# Altium PCB PCB.PcbDoc
Units mil, origin at the board's own origin, x right, y up, seen from the top; angles counter-clockwise.
Board outline 6000 x 4000 mil, 2 copper layers (Top Layer, Bottom Layer); 75 components, 68 nets, 209 pads, 0 vias.
Unrouted connection lines stored in the file: 142.
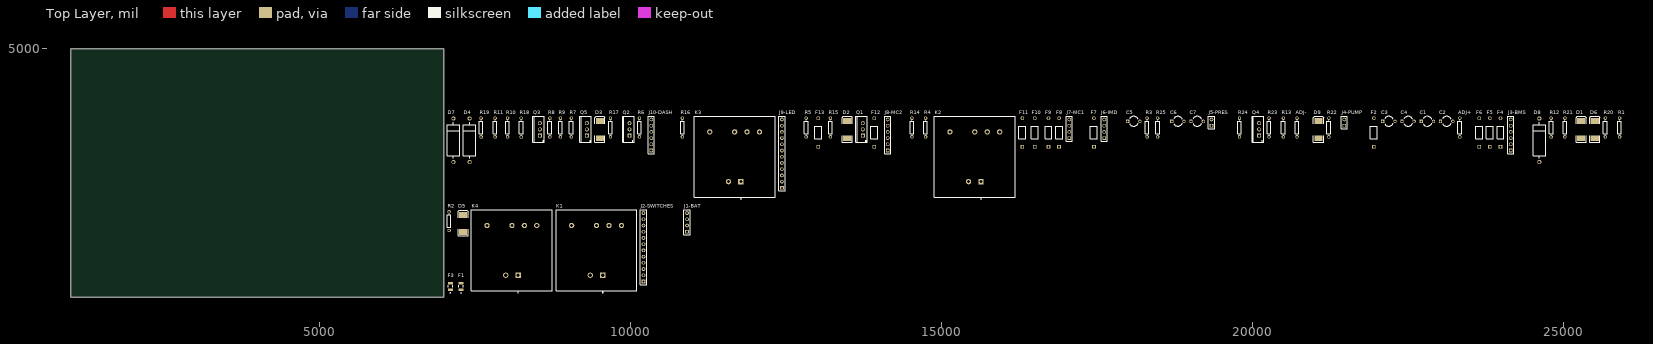
[diagram p0: Top Layer view]
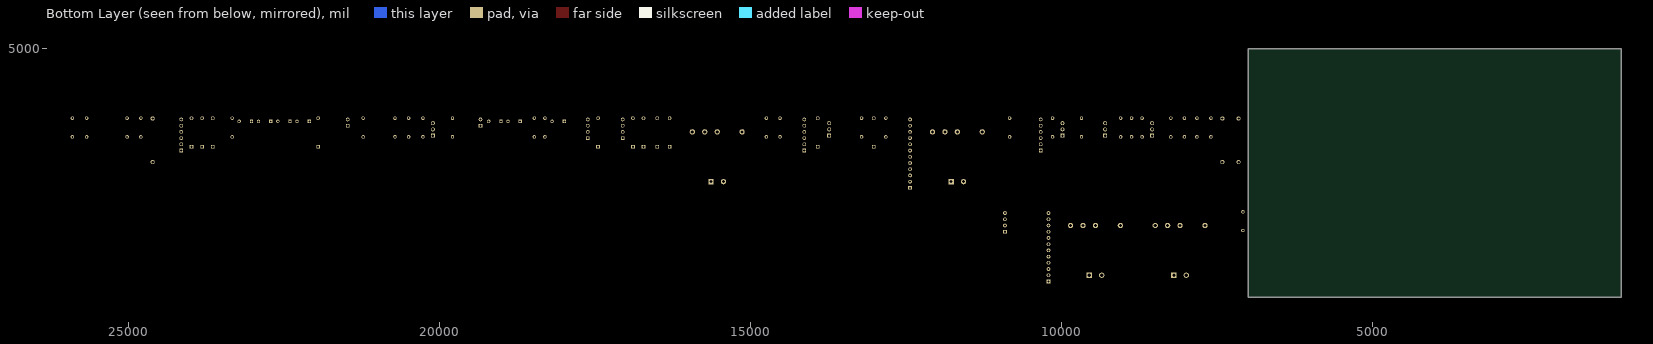
[diagram p1: Bottom Layer view, seen from below]

## Layer stack, top to bottom
Top Solder: solder mask 0.4, Solder Resist, Dk 3.5
Top Layer: signal copper 1.4
Dielectric 1: dielectric 12.6, FR-4, Dk 4.8
Bottom Layer: signal copper 1.4
Bottom Solder: solder mask 0.4, Solder Resist, Dk 3.5

## Board outline
1000,1000 7000,1000 7000,5000 1000,5000

## Design rules (kind name [scope] priority, off if disabled: settings)
Clearance [All] p1: gap=10 ignorepadtopadclearanceinfootprint=FALSE except(0: Arc-Hole Track-Hole SMDPad-Hole THPad-Hole Via-Hole Fill-Hole Poly-Hole Region-Hole Text-Hole)
PolygonConnect [All] p1: connectstyle=Relief reliefconductorwidth=10 reliefentries=4 polygonreliefangle="90 Angle" airgapwidth=10
RoomDefinition Schematic [InComponentClass('Schematic')] p1: confinementstyle=ConfineIn formatcopy=TRUE lockcomponents=FALSE outline 7045,1060 25975,1060 25975,4020 7045,4020
RoutingVias [All] p1: holewidth=28 width=50 viastyle="Through Hole" minholewidth=28 minwidth=50 maxholewidth=28 maxwidth=50
SolderMaskExpansion [All] p1: expansion=4
Width [All] p1: maxlimit=10 minlimit=10 preferedwidth=10
30 further rules are at their usual default settings.

## Components (designator, comment, footprint, x,y, rotation, side; value= is the part's Value field where it differs from the comment)
ADJ+ "Res1" AXIAL-0.3 23330,3730 r90 top value=1K
ADJ- "Res1" AXIAL-0.3 20715,3730 r90 top value=1K
C1 "" CAPR5-4X5 22810,3830 r0 top value=100pF
C2 "" CAPR5-4X5 23120,3830 r0 top value=100pF
C3 "" CAPR5-4X5 22190,3830 r0 top value="220 uF"
C4 "" CAPR5-4X5 22500,3830 r0 top value="220 uF"
C5 "Cap2" CAPR5-4X5 18090,3830 r0 top value=100pF
C6 "Cap2" CAPR5-4X5 18800,3830 r0 top value="220 uF"
C7 "Cap2" CAPR5-4X5 19110,3830 r0 top value="220 uF"
D1 "Diode" SMC 25280,3695 r90 top
D2 "Diode" SMC 13485,3695 r90 top
D3 "Diode" SMC 9510,3695 r90 top
D4 "D Zener" DIODE-0.7 7415,3525 r90 top
D5 "Diode" SMC 7310,2190 r90 top
D6 "Diode" SMC 25500,3695 r90 top
D7 "D1" DIODE-0.7 7155,3525 r90 top
D8 "D Zener" DIODE-0.7 24610,3525 r90 top
D9 "Diode" SMC 21060,3695 r90 top
F1 "3413.0330.22" FUS_SCHURTER_341 7275,1175 r90 top value=Value
F2 "7 A" PIN-W2/E2.8 21950,3650 r90 top
F3 "3413.0330.22" FUS_SCHURTER_341 7105,1175 r90 top value=Value
F4 "100 mA" PIN-W2/E2.8 23985,3650 r90 top
F5 "1 A" PIN-W2/E2.8 23815,3650 r90 top
F6 "100 mA" PIN-W2/E2.8 23645,3650 r90 top
F7 "100 mA" PIN-W2/E2.8 17450,3650 r90 top
F8 "100 mA" PIN-W2/E2.8 16890,3650 r90 top
F9 "100 mA" PIN-W2/E2.8 16720,3650 r90 top
F10 "100 mA" PIN-W2/E2.8 16500,3650 r90 top
F11 "100 mA" PIN-W2/E2.8 16300,3650 r90 top
F12 "100 mA" PIN-W2/E2.8 13920,3650 r90 top
F13 "100 mA" PIN-W2/E2.8 13020,3650 r90 top
J1-BAT "Part Name" HDR1X4 10910,2055 r90 top
J2-SWITCHES "Header 12" HDR1X12 10210,1255 r90 top
J3-BMS "Header 6" HDR1X6 24150,3360 r90 top
J4-PUMP "Header 2" HDR1X2 21475,3760 r90 top
J5-PRES "Header 2" HDR1X2 19340,3760 r90 top
J6-IMD "Header 4" HDR1X4 17615,3560 r90 top
J7-MC1 "Header 4" HDR1X4 17055,3560 r90 top
J8-MC2 "Header 6" HDR1X6 14135,3360 r90 top
J9-LED "Header 12" HDR1X12 12435,2760 r90 top
J10-DASH "Header 6" HDR1X6 10335,3360 r90 top
K1 "Relay-DPST" MODULE6 9455,1755 r0 top
K2 "Relay-DPST" MODULE6 15535,3260 r0 top
K3 "Relay-DPST" MODULE6 11675,3260 r0 top
K4 "Relay-DPST" MODULE6 8095,1755 r0 top
Q1 "NMOS-2" TO-220AB 13735,3700 r90 top
Q2 "NMOS-2" TO-220AB 9985,3700 r90 top
Q3 "NMOS-2" TO-220AB 8545,3700 r90 top
Q4 "NMOS-2" TO-220AB 20105,3700 r90 top
Q5 "PMOS-2" TO-220AB 9300,3700 r90 top
R1 "Res1" AXIAL-0.3 25900,3730 r90 top value=71.5
R2 "Res1" AXIAL-0.3 7085,2225 r90 top value=71.5
R3 "Res1" AXIAL-0.3 18305,3730 r90 top value=1K
R4 "Res1" AXIAL-0.3 14745,3730 r90 top value=510
R5 "Res1" AXIAL-0.3 12825,3730 r90 top value=100
R6 "Res1" AXIAL-0.3 10145,3730 r90 top value=510
R7 "Res1" AXIAL-0.3 9050,3730 r90 top value=1K
R8 "Res1" AXIAL-0.3 8705,3730 r90 top value=510
R9 "Res1" AXIAL-0.3 8875,3730 r90 top value=10K
R10 "Res1" AXIAL-0.3 8025,3730 r90 top value=2.2K
R11 "Res1" AXIAL-0.3 7825,3730 r90 top value=1K
R12 "Res1" AXIAL-0.3 24800,3730 r90 top value=442
R13 "Res1" AXIAL-0.3 20495,3730 r90 top value=10K
R14 "Res1" AXIAL-0.3 14525,3730 r90 top value=84.5K
R15 "Res1" AXIAL-0.3 13215,3730 r90 top value=34.0K
R16 "Res1" AXIAL-0.3 10835,3730 r90 top value=10K
R17 "Res1" AXIAL-0.3 9680,3730 r90 top value=10K
R18 "Res1" AXIAL-0.3 8245,3730 r90 top value=510
R19 "Res1" AXIAL-0.3 7600,3730 r90 top value=10K
R20 "Res1" AXIAL-0.3 25670,3730 r90 top value=510
R21 "Res1" AXIAL-0.3 25020,3730 r90 top value=10K
R22 "Res1" AXIAL-0.3 21225,3730 r90 top value=1.1K
R23 "Res1" AXIAL-0.3 20265,3730 r90 top value=510
R24 "Res1" AXIAL-0.3 19790,3730 r90 top value=150
R25 "Res1" AXIAL-0.3 18475,3730 r90 top value=510

## Footprints (in the part's own frame and the unit in brackets; to place one, negate y for a bottom-side part, rotate by r counter-clockwise, add the part's x,y. Pads: shape width x height; smd on the part's side, far side on the other; paste and mask are expansions set on the pad)
AXIAL-0.3 [mm] "Axial Device, Thru-Hole; 2 Leads; 0.3 in Pin Spacing"
  round 1.4 hole 0.85: 1(-3.81,0) 2(3.81,0)
  silkscreen extent -2.77,-0.76 2.77,0.76
CAPR5-4X5 [mm] "Capacitor; 2 Leads"
  rect 1.35x1.35 hole 0.8: 1(-2.5,0)
  round 1.35 hole 0.8: 2(2.5,0)
  silkscreen extent -1.69,-2 1.82,2
DIODE-0.7 [mm] "Diode, Thru-Hole; 2 Leads; 0.7 in Pin Spacing"
  round 1.65 hole 1: 1(-8.89,0) 2(8.89,0)
  silkscreen extent -7.37,-2.54 7.37,2.54
FUS_SCHURTER_341 [mil]
  rect 43.5x79 smd paste+0 mask+0: 1(-51.25,0) 2(51.25,0)
  silkscreen extent -106,-36 16,36, body extent -63,-39 115,45, height 24
HDR1X2 [mm] "Connector; Header; 2 Position"
  rect 1.5x1.5 hole 0.9: 1(0,0)
  round 1.5 hole 0.9: 2(2.54,0)
  silkscreen extent -1.27,-1.27 3.81,1.27
HDR1X4 [mm] "Connector; Header; 4 Position"
  rect 1.5x1.5 hole 0.9: 1(0,0)
  round 1.5 hole 0.9: 2(2.54,0) 3(5.08,0) 4(7.62,0)
  silkscreen extent -1.27,-1.27 8.89,1.27
HDR1X6 [mm] "Connector; Header; 6 Position"
  rect 1.5x1.5 hole 0.9: 1(0,0)
  round 1.5 hole 0.9: 2(2.54,0) 3(5.08,0) 4(7.62,0) 5(10.16,0) 6(12.7,0)
  silkscreen extent -1.27,-1.27 13.97,1.27
HDR1X12 [mm] "Connector; Header; 12 Position"
  rect 1.5x1.5 hole 0.9: 1(0,0)
  round 1.5 hole 0.9: 2(2.54,0) 3(5.08,0) 4(7.62,0) 5(10.16,0) 6(12.7,0) 7(15.24,0) 8(17.78,0) 9(20.32,0) 10(22.86,0) 11(25.4,0) 12(27.94,0)
  silkscreen extent -1.27,-1.27 29.21,1.27
MODULE6 [mm] "DIP; 6 Round Pins; Row Space 20.32 mm; Pitch 2.54 mm"
  rect 2.15x2.15 hole 1.3: 1(2.54,-10.16)
  round 2.15 hole 1.3: 2(-2.54,-10.16) 3(10.16,10.16) 4(5.08,10.16) 5(0,10.16) 6(-10.16,10.16)
  silkscreen extent -16.5,-17.27 16.5,16.5, body extent -16.5,-16.5 16.5,16.5, height 16.5
PIN-W2/E2.8 [mm] "Thru-Hole; 2 Leads"
  rect 1.5x1.5 hole 0.9: 1(-5.825,0)
  round 1.5 hole 0.9: 2(5.825,0)
  silkscreen extent -2.65,-1.4 2.65,1.4
SMC [mm] "DO-214-AB/SMC; 2 C-Bend Leads; Body 7.9 x 5.9 mm, inc. leads (LxW)"
  rect 2.4x3.3 smd: 1(-3.475,0) 2(3.475,0)
  silkscreen extent -5.07,-2.05 5.43,2.05
TO-220AB [mm] "TO, Thru-Hole, Vertical, Heatsink Mounted; 3 In-Line Leads; Pitch 2.54 mm"
  rect 1.6x1.6 hole 1: 1(-2.54,0)
  round 1.6 hole 1: 2(0,0) 3(2.54,0)
  silkscreen extent -5.35,-1.85 5.35,2.85, body extent -5.4,-1.9 5.4,2.9, height 19.3

## Part data
ADJ+ ADJ- R1 R2 R3 R4 R5 R6 R7 R8 R9 R10 R11 R12 R13 R14 R15 R16 R17 R18 R19 R20 R21 R22 R23 R24 R25: "Resistor", LatestRevisionDate=17-Jul-2002, LatestRevisionNote="Re-released for DXP Platform.", PackageDescription="Axial Device, Thru-Hole; 2 Leads; 0.3 in Pin Spacing", PackageReference=AXIAL-0.3, Published=8-Jun-2000, Publisher="Altium Limited"
C1 C2 C3 C4: library part Cap2, "Capacitor", PackageDescription="Capacitor; 2 Leads", PackageReference=CAPR5-4X5, Published=23-Sep-2002, Publisher="Altium Limited"
C5 C6 C7: "Capacitor", PackageDescription="Capacitor; 2 Leads", PackageReference=CAPR5-4X5, Published=23-Sep-2002, Publisher="Altium Limited"
D1 D2 D3 D5 D6 D9: "Default Diode", Code_JEDEC=DO-214-AB, LatestRevisionDate=17-Jul-2002, LatestRevisionNote="Re-released for DXP Platform.", PackageDescription="DO-214-AB/SMC; 2 C-Bend Leads; Body 7.9 x 5.9 mm, inc. leads (LxW)", PackageReference=SMC, PackageVersion=Sep-1996, Published=8-Jun-2000, Publisher="Altium Limited"
D4 D8: "Zener Diode", LatestRevisionDate=17-Jul-2002, LatestRevisionNote="Re-released for DXP Platform.", PackageDescription="Diode, Thru-Hole; 2 Leads; 0.7 in Pin Spacing", PackageReference=DIODE-0.7, Published=8-Jun-2000, Publisher="Altium Limited"
D7: library part "D Zener", "Zener Diode", LatestRevisionDate=17-Jul-2002, LatestRevisionNote="Re-released for DXP Platform.", PackageDescription="Diode, Thru-Hole; 2 Leads; 0.7 in Pin Spacing", PackageReference=DIODE-0.7, Published=8-Jun-2000, Publisher="Altium Limited"
F1 F3: "Imported", Built_By=EMA_UL_Team, C="Copyright (C) 2015 Accelerated Designs. All rights reserved", Manufacturer_Part_Number=3413.0330.22, RefDes=RefDes, Type=DEV, Vendor="Schurter Inc"
F2 F4 F5 F6 F7 F8 F9 F10 F11 F12 F13: library part "Fuse 2", "Fuse", LatestRevisionDate=17-Jul-2002, LatestRevisionNote="Re-released for DXP Platform.", PackageDescription="Thru-Hole; 2 Leads", PackageReference=PIN-W2/E2.8, Published=8-Jun-2000, Publisher="Altium Limited"
J1-BAT: library part "Header 4", "Header, 4-Pin", LatestRevisionDate=17-Jul-2002, LatestRevisionNote="Re-released for DXP Platform.", Publisher="Altium Limited"
J2-SWITCHES J9-LED: "Header, 12-Pin", LatestRevisionDate=17-Jul-2002, LatestRevisionNote="Re-released for DXP Platform.", Publisher="Altium Limited"
J3-BMS J8-MC2 J10-DASH: "Header, 6-Pin", LatestRevisionDate=17-Jul-2002, LatestRevisionNote="Re-released for DXP Platform.", Publisher="Altium Limited"
J4-PUMP J5-PRES: "Header, 2-Pin", LatestRevisionDate=17-Jul-2002, LatestRevisionNote="Re-released for DXP Platform.", Publisher="Altium Limited"
J6-IMD J7-MC1: "Header, 4-Pin", LatestRevisionDate=17-Jul-2002, LatestRevisionNote="Re-released for DXP Platform.", Publisher="Altium Limited"
K1 K2 K3 K4: "Dual-Pole Single-Throw Relay", LatestRevisionDate=17-Jul-2002, LatestRevisionNote="Re-released for DXP Platform.", PackageReference=MODULE6, Published=24-Mar-1999, Publisher="Altium Limited"
Q1 Q2 Q3 Q4: "N-Channel Power MOSFET", ComponentLink1Description="Manufacturer Link", ComponentLink1URL=http://www.irf.com/, DatasheetVersion=PD-9.814, LatestRevisionDate=17-Jul-2002, LatestRevisionNote="Re-released for DXP Platform.", Note="Pin 2 is electrically connected to pin 4.", PackageDescription="TO, Thru-Hole, Vertical, Heatsink Mounted; 3 In-Line Leads; Pitch 2.54 mm", PackageReference=TO-220AB, PackageVersion=Feb-1997, Published=8-Jun-2000, Publisher="Altium Limited"
Q5: "P-Channel Power MOSFET", ComponentLink1Description="Manufacturer Link", ComponentLink1URL=http://www.irf.com/, DatasheetVersion=PD-9.390D, LatestRevisionDate=17-Jul-2002, LatestRevisionNote="Re-released for DXP Platform.", Note="Pin 4 not drawn and electrically connected to Pin 2.", PackageDescription="TO, Thru-Hole, Vertical, Heatsink Mounted; 3 In-Line Leads; Pitch 2.54 mm", PackageReference=TO-220AB, PackageVersion=Feb-1997, Published=8-Jun-2000, Publisher="Altium Limited"

## Nets (pads, with @x,y where several pads share a name; then routed paths per layer and width w, separated by ;. In a path a pad name is that pad's centre, name@x,y a point inside that pad or via, vN(x,y) a via of type N, cw(c..) or ccw(c..) an arc to the next point about the centre after c; other vN are vias at no path point)
GND: ADJ+.2 C1.2 C2.2 C3.2 C4.2 C5.2 C6.2 C7.2 D4.1 D7.1 D8.1 D9.1 F9.2 J1-BAT.3 J1-BAT.4 J2-SWITCHES.7 J2-SWITCHES.11 J2-SWITCHES.12 J3-BMS.5 J3-BMS.6 J4-PUMP.1 J6-IMD.4 J8-MC2.5 J8-MC2.6 J10-DASH.1 Q1.3 Q3.3 Q4.3 R3.2 R10.2 R15.1
Net*_1: 
Net*_3: C1.1 C2.1 C5.1 K1.2 K1.4 R14.1 R22.1
Net*_4: ADJ-.1 F2.1
Net*_5: ADJ+.1 ADJ-.2
NetC3_1: C3.1 C4.1 F2.2 J10-DASH.4 R24.1
NetC6_1: C6.1 C7.1 D2.2 D6.2 F3.2 F5.2 J2-SWITCHES.4 J2-SWITCHES.5 J2-SWITCHES.6 K2.1 K2.3 K2.5 K4.1 K4.3 K4.5 Q5.3 R17.1 R23.1 R25.1
NetD1_1: D1.1 K1.6 R1.1
NetD1_2: D1.2 F1.2 K1.1 K1.3 K1.5
NetD2_1: D2.1 K2.6 Q1.2
NetD3_1: D3.1 K3.6 Q2.2
NetD3_2: D3.2 D9.2 J4-PUMP.2 K2.2 K2.4 K3.1 K3.3 K3.5 R4.1
NetD4_2: D4.2 J10-DASH.2 R11.2
NetD5_1: D5.1 F8.2 K3.2 K3.4 R6.2
NetD5_2: D5.2 K4.2 K4.4
NetD6_1: D6.1 F13.2 K4.6 R12.1
NetD7_2: D7.2 J10-DASH.5 R19.1
NetD8_2: D8.2 J10-DASH.3 R21.1
NetF1_1: F1.1 J1-BAT.1 J1-BAT.2
NetF3_1: F3.1
NetF4_1: F4.1 J3-BMS.4
NetF4_2: F4.2 R16.1 R17.2
NetF5_1: F5.1 J3-BMS.2 J3-BMS.3
NetF6_1: F6.1 J3-BMS.1
NetF6_2: F6.2
NetF7_1: F7.1 J6-IMD.3
NetF7_2: F7.2 R8.1 R9.1 R10.1 R11.1
NetF8_1: F8.1 J7-MC1.4
NetF9_1: F9.1 J7-MC1.3
NetF10_1: F10.1 J7-MC1.2
NetF10_2: F10.2 J2-SWITCHES.10
NetF11_1: F11.1 J7-MC1.1
NetF11_2: F11.2 Q4.2
NetF12_1: F12.1 J8-MC2.4
NetF12_2: F12.2 R25.2
NetF13_1: F13.1 J8-MC2.1
NetJ2-SWITCHES_1: J2-SWITCHES.1 R2.2
NetJ2-SWITCHES_2: J2-SWITCHES.2
NetJ2-SWITCHES_3: J2-SWITCHES.3
NetJ2-SWITCHES_8: J2-SWITCHES.8 R5.1
NetJ2-SWITCHES_9: J2-SWITCHES.9 R7.1
NetJ5-PRES_1: J5-PRES.1 Q5.2 R18.2 R19.2
NetJ5-PRES_2: J5-PRES.2 R20.1 R21.2
NetJ6-IMD_1: J6-IMD.1 J6-IMD.2 J8-MC2.2 J8-MC2.3
NetJ9-LED_1: J9-LED.1 R22.2
NetJ9-LED_2: J9-LED.2 R23.2
NetJ9-LED_3: J9-LED.3 R24.2
NetJ9-LED_4: J9-LED.4
NetJ9-LED_5: J9-LED.5 R4.2
NetJ9-LED_6: J9-LED.6 R20.2
NetJ9-LED_7: J9-LED.7 R8.2
NetJ9-LED_8: J9-LED.8 R6.1
NetJ9-LED_9: J9-LED.9 R12.2
NetJ9-LED_10: J9-LED.10
NetJ9-LED_11: J9-LED.11
NetJ10-DASH_6: J10-DASH.6
NetQ1_1: Q1.1 R5.2
NetQ2_1: Q2.1 R7.2
NetQ2_3: Q2.3 Q3.2
NetQ3_1: Q3.1 R9.2
NetQ4_1: Q4.1 R13.1
NetQ5_1: Q5.1 R16.2
NetR1_2: R1.2 R2.1
NetR3_1: R3.1
NetR13_2: R13.2
NetR14_2: R14.2 R15.2
NetR18_1: R18.1
NetS1_2: 
pads on no net: J9-LED.12